# Altium PCB Glucometer-InstrumentationCircuit-SMD.PcbDoc
Units mm, origin at the board's own origin, x right, y up, seen from the top; angles counter-clockwise.
Board outline 83.5 x 91.75 mm, 2 copper layers (Top Layer, Bottom Layer); 34 components, 43 nets, 154 pads, 0 vias.
Unrouted connection lines stored in the file: 101.
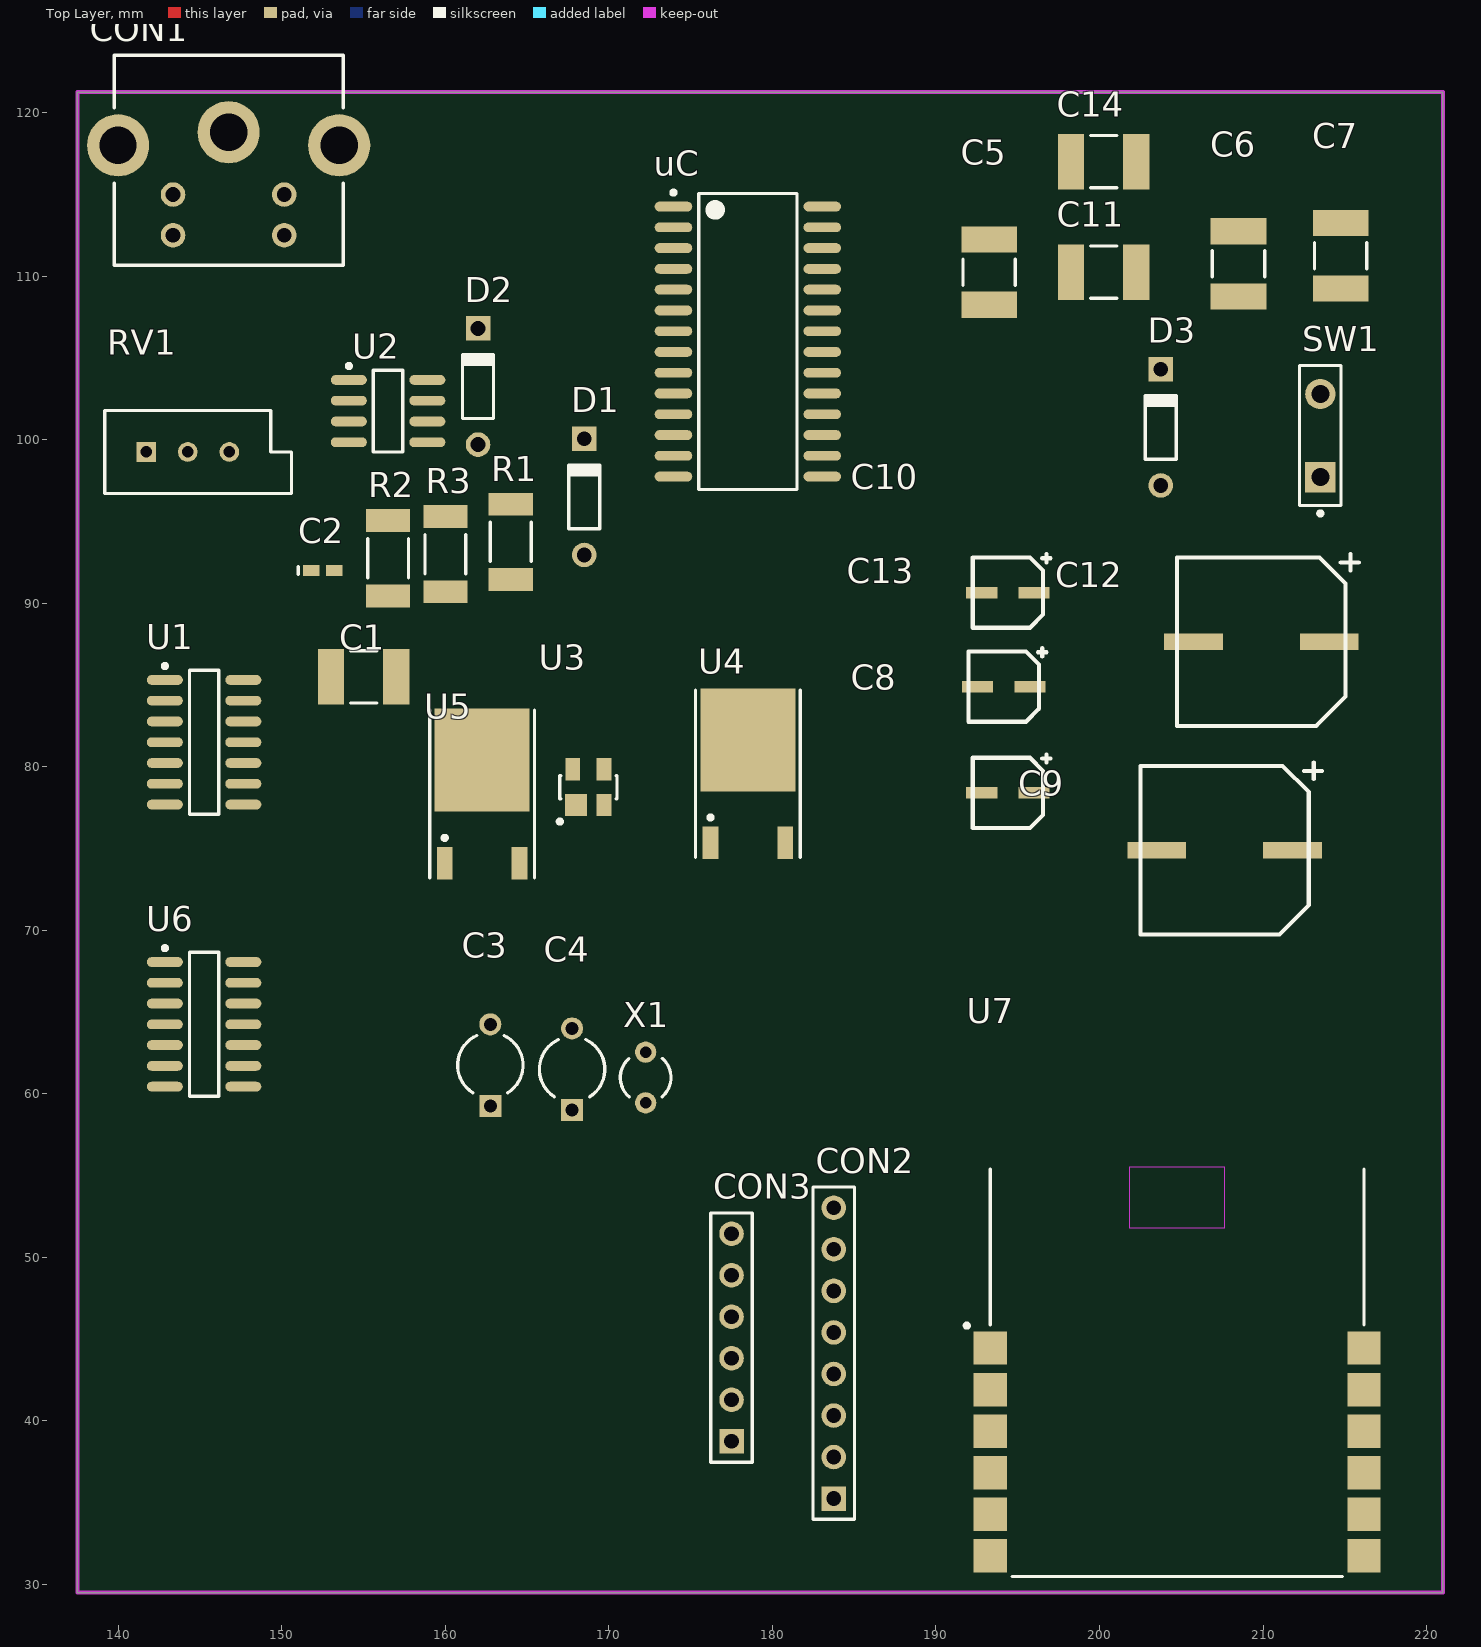
[diagram p0: Top Layer view]
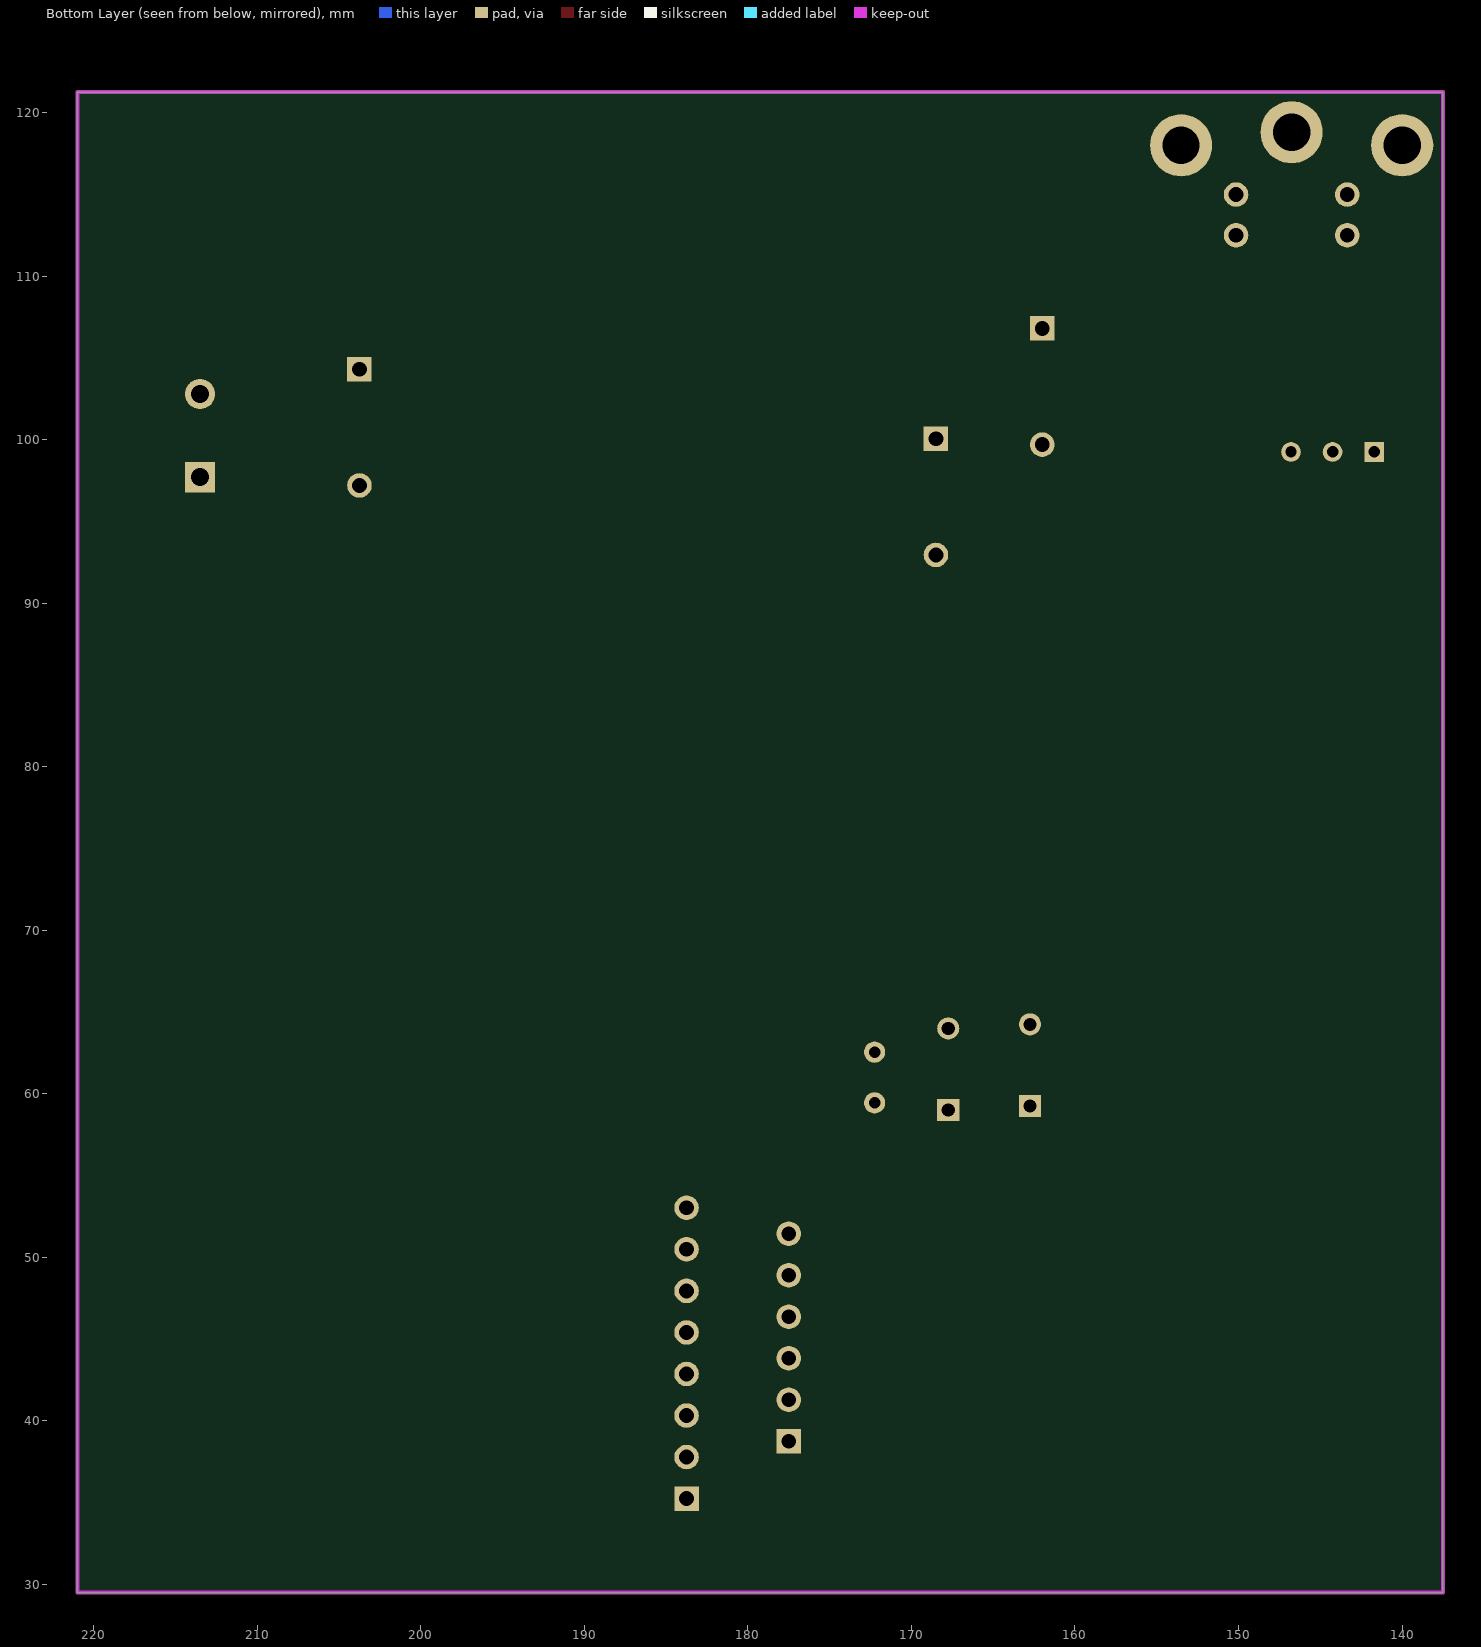
[diagram p1: Bottom Layer view, seen from below]

## Layer stack, top to bottom
Top Layer: signal copper 0.0356
Dielectric: dielectric 0.32, FR-4, Dk 4.8
Bottom Layer: signal copper 0.0356

## Board outline
137.5,29.5 137.5,121.25 221,121.25 221,29.5

## Design rules (kind name [scope] priority, off if disabled: settings)
AssemblyTestPointUsage AssemblyTestPointUsage_1 [All] p2:
AssemblyTestpoint AssemblyTestpoint_1 [All] p2: testpointundercomponent=TRUE minsize=1.016 maxsize=2.54 preferedsize=1.524 minholesize=0 maxholesize=1.016 preferedholesize=0.813 testpointgrid=0.025 usegrid=TRUE gridtolerance=0 allowsidetop=TRUE allowsidebottom=TRUE
Clearance [All] p1: gap=0.25
ComponentClearance ComponentClearance_1 [All] p2: gap=0.254 collisioncheckmode=3 verticalgap=0.254 showdistances=FALSE
DiffPairsRouting DiffPairsRouting_1 [All] p2: maxlimit=0.254 minlimit=0.254 mostfreqgap=0.254 maxuncoupledlength=12.7
FabricationTestPointUsage TestPointUsage [All] p2: valid=0 allowmultiple=FALSE
FabricationTestpoint Testpoint [All] p2: side=3 testpointundercomponent=TRUE minsize=1.016 maxsize=2.54 preferedsize=1.524 minholesize=0 maxholesize=1.016 preferedholesize=0.813 testpointgrid=0.025 allowsidetop=TRUE allowsidebottom=TRUE usegrid=TRUE gridtolerance=0
FanoutControl Fanout_LCC [IsLCC] p1: bgadir=Out bgaviamode=Centered fanoutstyle=Auto fanoutdirection=Alternating viagrid=0.025 // Fanout_LCC (Default Rule)
FanoutControl Fanout_BGA [IsBGA] p2: bgadir=Out bgaviamode=Centered fanoutstyle=Auto fanoutdirection=Alternating viagrid=0.025 // Fanout_BGA (Default Rule)
FanoutControl Fanout_Default [All] p4: bgadir=Out bgaviamode=Centered fanoutstyle=Auto fanoutdirection=Alternating viagrid=0.025 // Fanout_Default (Default Rule)
FanoutControl Fanout_Small [(CompPinCount < 5)] p5: bgadir=Out bgaviamode=Centered fanoutstyle=Auto fanoutdirection=OutThenIn viagrid=0.025 // Fanout_Small (Default Rule)
FanoutControl Fanout_BGA_1 [IsBGA] p6: bgadir=Out bgaviamode=Centered fanoutstyle=Auto fanoutdirection=Alternating viagrid=0.025 // Fanout_BGA (Default Rule)
FanoutControl Fanout_LCC_1 [IsLCC] p7: bgadir=Out bgaviamode=Centered fanoutstyle=Auto fanoutdirection=Alternating viagrid=0.025 // Fanout_LCC (Default Rule)
FanoutControl Fanout_SOIC_1 [IsSOIC] p8: bgadir=Out bgaviamode=Centered fanoutstyle=Auto fanoutdirection=Alternating viagrid=0.025 // Fanout_SOIC (Default Rule)
FanoutControl Fanout_Small_1 [(CompPinCount < 5)] p9: bgadir=Out bgaviamode=Centered fanoutstyle=Auto fanoutdirection=OutThenIn viagrid=0.025 // Fanout_Small (Default Rule)
FanoutControl Fanout_Default_1 [All] p10: bgadir=Out bgaviamode=Centered fanoutstyle=Auto fanoutdirection=Alternating viagrid=0.025 // Fanout_Default (Default Rule)
Height Height_1 [All] p2: minheight=0 maxheight=25.4 prefheight=12.7
HoleSize [All] p1: absolutevalues=TRUE maxlimit=5 minlimit=0.025 maxpercent=80.000 minpercent=20.000
HoleSize HoleSize_1 [All] p2: absolutevalues=TRUE maxlimit=5 minlimit=0.025 maxpercent=80.000 minpercent=20.000
HoleToHoleClearance HoleToHoleClearance_1 [All] p2: gap=0.254 allowstackedmicrovias=TRUE
LayerPairs LayerPairs_1 [All] p2: enforce=TRUE
MinimumSolderMaskSliver MinimumSolderMaskSliver_1 [All] p2: minsoldermaskwidth=0.254
NetAntennae NetAntennae_1 [All] p2: netantennaetolerance=0
PasteMaskExpansion PasteMaskExpansion_1 [All] p2: expansion=0
PlaneClearance PlaneClearance_1 [All] p2: clearance=0.508
PolygonConnect [All] p1: connectstyle=Relief reliefconductorwidth=0.254 reliefentries=4 polygonreliefangle="90 Angle" airgapwidth=0.254
PolygonConnect PolygonConnect_1 [All] p2: connectstyle=Relief reliefconductorwidth=0.254 reliefentries=4 polygonreliefangle="90 Angle" airgapwidth=0.254
RoutingPriority RoutingPriority_1 [All] p2: routingpriority=0
RoutingTopology RoutingTopology_1 [All] p2: topology=Shortest
RoutingVias [All] p1: holewidth=0.8 width=1.5 viastyle="Through Hole" minholewidth=0.7 minwidth=1 maxholewidth=1 maxwidth=2
ShortCircuit ShortCircuit_1 [All] p2: allowed=FALSE
SilkToSilkClearance SilkToSilkClearance_1 [All] p2: silktosilkclearance=0.254
SilkToSolderMaskClearance SilkscreenOverComponentPads [IsPad] p2: minsilkscreentomaskgap=0.254 clearancetoexposedcopper=TRUE
SolderMaskExpansion [All] p1: expansion=0.102
SolderMaskExpansion SolderMaskExpansion_1 [All] p2: expansion=0.102
UnRoutedNet UnRoutedNet_1 [All] p2:
Width [All] p1: maxlimit=5 minlimit=0.25 preferedwidth=0.3 minimp=50.000000 maximp=50.000000 favimp=50.000000
23 further rules are at their usual default settings.

## Classes and differential pairs
component class Glucometer-InstrumentationCircuit-SMD: C1 C2 C3 C4 C5 C6 C7 C8 C9 C10 C11 C12 C13 C14 CON1 CON3 D1 D2 D3 R1 R2 R3 RV1 SW1 U1 U2 U3 U4 U5 U7 uC X1

## Components (designator, comment, footprint, x,y, rotation, side; value= is the part's Value field where it differs from the comment)
C1 "Cap2" CAPC4532N 155,85.5 r0 top
C2 "Cap2" CAPC1005M 152.5,92 r0 top
C3 "Cap" CAPR5-4X5 162.75,61.75 r90 top
C4 "Cap" CAPR5-4X5 167.75,61.5 r90 top
C5 "Cap" CAPC4532N 193.25,110.25 r90 top
C6 "Cap" CAPC4532N 208.5,110.75 r90 top
C7 "Cap" CAPC4532N 214.75,111.25 r90 top
C8 "Cap Pol1" C-4x4 192.25,76.25 r0 top
C9 "Cap Pol1" C-10x10 202.5,69.75 r0 top
C10 "Cap Pol1" C-4x4 192.25,88.5 r0 top
C11 "Cap" CAPC4532N 200.25,110.25 r0 top
C12 "Cap Pol1" C-10x10 204.75,82.5 r0 top
C13 "Cap Pol1" C-4x4 192,82.75 r0 top
C14 "Cap" CAPC4532N 200.25,117 r0 top
CON1 "" CDIN2.6-3H4A 146.75,123.5 r270 top
CON2 "Header 8" HDR1X8 183.75,35.25 r90 top
CON3 "Header 6" HDR1X6 177.5,38.75 r90 top
D1 "1N4148" DO-35 168.5,96.5 r90 top
D2 "1N4148" DO-35 162,103.25 r90 top
D3 "1N4148" DO-35 203.75,100.75 r90 top
R1 "Res1" RESC5025N 164,93.75 r90 top
R2 "Res1" RESC5025N 156.5,92.75 r90 top
R3 "Res1" RESC5025N 160,93 r90 top
RV1 "RPot" VR5 144.25,99.25 r0 top
SW1 "SW-PB" SPST-2 213.5,100.25 r90 top
U1 "LMC6044IN" M14A_N 145.25,81.5 r0 top
U2 "LM385BM" M08A_N 156.5,101.75 r0 top
U3 "SMT811TW16F" SOT143 168.75,78.75 r0 top
U4 "µA78M33CKVURG3" KTP02 178.5,78.5 r0 top
U5 "µA78M05CKTPR" KTP02 162.25,77.25 r0 top
U6 "AD5241" R-14_N 145.25,64.25 r0 top
U7 "MRF24J40MB-I/RM" MRF24J40MB 204.75,55.5 r0 top
uC "PIC24FJ64GA102-I/SO" SOIC-SO28_N 178.5,106 r0 top
X1 "XTAL" R38 172.25,61 r0 top

## Footprints (in the part's own frame and the unit in brackets; to place one, negate y for a bottom-side part, rotate by r counter-clockwise, add the part's x,y. Pads: shape width x height; smd on the part's side, far side on the other; paste and mask are expansions set on the pad)
C-4x4 [mm] "SMD Polar Aluminium Capacitor, 4x4mm, 10V"
  rect 1.9x0.7 smd: 1(3.75,2.15) 2(0.55,2.15)
  silkscreen extent 0,0 4.75,4.5, body extent 0,0 4.3,4.3, height 5.4
C-10x10 [mm] "SMD Polar Aluminium Capacitor, 10x10mm, 10V"
  rect 3.6x1 smd: 1(9.3,5.15) 2(1,5.15)
  silkscreen extent 0,0 11.1,10.5, body extent 0,0 10.3,10.3, height 10.3
CAPC1005M [mm] "Chip Capacitor, Body 1.0x0.5mm, IPC Low Density"
  rect 1x0.7 smd: 1(-0.7,0) 2(0.7,0)
  silkscreen extent -1.5,-0.25 -1.5,0.25, body extent -0.55,-0.3 0.55,0.3, height 0.6
CAPC4532N [mm] "Chip Capacitor, Body 4.5x3.2mm, IPC Medium Density"
  rect 1.6x3.4 smd: 1(-2,0) 2(2,0)
  silkscreen extent -0.8,-1.6 0.8,1.6, body extent -2.4,-1.7 2.4,1.7, height 1.35
CAPR5-4X5 [mm] "Capacitor; 2 Leads"
  rect 1.35x1.35 hole 0.8: 1(-2.5,0)
  round 1.35 hole 0.8: 2(2.5,0)
  silkscreen extent -1.69,-2 1.82,2
CDIN2.6-3H4A [mm] "Connector; Circular DIN, Thru-Hole; 4 Position; Right Angle; Pitch 2.1/2.6 mm; Body 14 x 12.84 x 13 mm (WxTxH), Shielded, Special PCB Retention"
  round 1.5 hole 0.9: 1(8.51,-3.4) 2(8.51,3.4) 3(11,-3.4) 4(11,3.4)
  round 3.8 hole 2.28: MH1(5.5,-6.76) MH2(4.7,0) MH3(5.5,6.76)
  silkscreen extent 0,-7 12.84,7, body extent 0,-7 12.84,7, height 13
DO-35 [mm] "Diode, Axial; Body 3.8 x 1.9 mm (LxDia. max), Lead Dia. 0.53 mm (max)"
  round 1.5 hole 0.9: 1(-3.55,0)
  rect 1.5x1.5 hole 0.9: 2(3.55,0)
  silkscreen extent -1.95,-0.95 2.05,0.95
HDR1X6 [mm] "Connector; Header; 6 Position"
  rect 1.5x1.5 hole 0.9: 1(0,0)
  round 1.5 hole 0.9: 2(2.54,0) 3(5.08,0) 4(7.62,0) 5(10.16,0) 6(12.7,0)
  silkscreen extent -1.27,-1.27 13.97,1.27
HDR1X8 [mm] "Connector; Header; 8 Position"
  rect 1.5x1.5 hole 0.9: 1(0,0)
  round 1.5 hole 0.9: 2(2.54,0) 3(5.08,0) 4(7.62,0) 5(10.16,0) 6(12.7,0) 7(15.24,0) 8(17.78,0)
  silkscreen extent -1.27,-1.27 19.05,1.27
KTP02 [mm] "PowerFLEX (D-PAK/TO-252-AA); 3 Leads (1 Cropped); Body 9.7 (inc. leads) x 6.2 mm (LxW max)"
  rect 0.95x2 smd: 1(-2.285,-3.15) 3(2.285,-3.15)
  rect 5.8x6.3 smd: 4(0,3.15)
  silkscreen extent -3.2,-4.05 3.2,6.2
M08A_N [mm] "SOIC, 8-Leads, Body 4.9x3.9mm, Pitch 1.27mm, IPC Medium Density"
  oval 2.2x0.6 smd: 1(-2.4,1.905) 2(-2.4,0.635) 3(-2.4,-0.635) 4(-2.4,-1.905) 5(2.4,-1.905) 6(2.4,-0.635) 7(2.4,0.635) 8(2.4,1.905)
  silkscreen extent -2.52,-2.5 0.9,2.88, body extent -2,-2.5 2,2.5, height 1.75
M14A_N [mm] "SOIC, 14-Leads, Body 8.6x3.9mm, Pitch 1.27mm, IPC Medium Density"
  oval 2.2x0.6 smd: 1(-2.4,3.81) 2(-2.4,2.54) 3(-2.4,1.27) 4(-2.4,0) 5(-2.4,-1.27) 6(-2.4,-2.54) 7(-2.4,-3.81) 8(2.4,-3.81) 9(2.4,-2.54) 10(2.4,-1.27) 11(2.4,0) 12(2.4,1.27) 13(2.4,2.54) 14(2.4,3.81)
  silkscreen extent -2.52,-4.4 0.9,4.78, body extent -2,-4.38 2,4.38, height 1.75
MRF24J40MB [mil] "SM Module; 12 Leads; Body 33x22.9x2.5mm (LxWxH), Microchip Recommended"
  rect 80x80 smd paste-159.45 mask+2: 1(-450,-435) 2(-450,-535) 3(-450,-635) 4(-450,-735) 5(-450,-835) 6(-450,-935) 7(450,-935) 8(450,-835) 9(450,-735) 10(450,-635) 11(450,-535) 12(450,-435)
  Top Layer keep-out region: -115,-145 115,-145 115,0 -115,0
  silkscreen extent -511,-985 450,-4, body extent -450,-985 450,315, height 100
R38 [mm] "Crystal, Thru-Hole; 2 Leads; Body 3.1 x 8.2 mm (Dia.xH)"
  round 1.3 hole 0.7: 1(0,1.55) 2(0,-1.55)
  silkscreen extent -1.55,-1.19 1.55,1.17
R-14_N [mm] "14-Pin Narrow Body Small Outline Integrated Circuit 1.27 mm Pitch, IPC Medium Density"
  oval 2.2x0.6 smd: 1(-2.4,3.81) 2(-2.4,2.54) 3(-2.4,1.27) 4(-2.4,0) 5(-2.4,-1.27) 6(-2.4,-2.54) 7(-2.4,-3.81) 8(2.4,-3.81) 9(2.4,-2.54) 10(2.4,-1.27) 11(2.4,0) 12(2.4,1.27) 13(2.4,2.54) 14(2.4,3.81)
  silkscreen extent -2.52,-4.4 0.9,4.78, body extent -1.95,-4.33 1.95,4.33, height 1.75
RESC5025N [mm] "Chip Resistor, Body 5.0x2.5mm, IPC Medium Density"
  rect 1.4x2.7 smd: 1(-2.3,0) 2(2.3,0)
  silkscreen extent -1.2,-1.25 1.2,1.25, body extent -2.58,-1.33 2.58,1.33, height 0.71
SOIC-SO28_N [mm] "SOIC, 28-Leads, Body 17.9x7.5mm, Pitch 1.27mm, IPC Medium Density"
  oval 2.3x0.6 smd: 1(-4.55,8.255) 2(-4.55,6.985) 3(-4.55,5.715) 4(-4.55,4.445) 5(-4.55,3.175) 6(-4.55,1.905) 7(-4.55,0.635) 8(-4.55,-0.635) 9(-4.55,-1.905) 10(-4.55,-3.175) 11(-4.55,-4.445) 12(-4.55,-5.715) 13(-4.55,-6.985) 14(-4.55,-8.255) 15(4.55,-8.255) 16(4.55,-6.985) 17(4.55,-5.715) 18(4.55,-4.445) 19(4.55,-3.175) 20(4.55,-1.905) 21(4.55,-0.635) 22(4.55,0.635) 23(4.55,1.905) 24(4.55,3.175) 25(4.55,4.445) 26(4.55,5.715) 27(4.55,6.985) 28(4.55,8.255)
  silkscreen extent -4.67,-9.05 3,9.23, body extent -3.8,-9.06 3.8,9.06, height 2.65
SOT143 [mm] "SOT-143; 4 Leads; Body 3 x 2.6 mm, inc. leads (LxW max)"
  rect 1.35x1.35 smd: 1(-0.75,-1.1)
  rect 0.9x1.35 smd: 2(0.95,-1.1) 3(0.95,1.1) 4(-0.95,1.1)
  silkscreen extent -1.87,-2.22 1.75,0.7
SPST-2 [mm] "Switch; 2 Leads"
  rect 1.85x1.85 hole 1.1: 1(-2.54,0)
  round 1.85 hole 1.1: 2(2.54,0)
  silkscreen extent -4.89,-1.27 4.28,1.27
VR5 [mm] "Thru-Hole; 3 Leads"
  rect 1.2x1.2 hole 0.7: 1(-2.54,0)
  round 1.2 hole 0.7: 2(0,0) 3(2.54,0)
  silkscreen extent -5.08,-2.54 6.35,2.54

## Part data
C1 C2 C3 C4 C5 C6 C7 C11 C14: "Capacitor"
C8 C9 C10 C12 C13: "Polarized Capacitor (Radial)"
CON1: library part "MiniDin 4Pins - SuperVideo", "MiniDin 4 Pins"
CON2: "Header, 8-Pin"
CON3: "Header, 6-Pin"
D1 D2 D3: "High Conductance Fast Diode"
R1 R2 R3: "Resistor"
RV1: "Potentiometer"
SW1: "Switch"
U1: "CMOS Quad Micropower Operational Amplifier, 14-pin MDIP"
U2: "Adjustable Micropower Voltage Reference, 8-pin Narrow SOIC"
U3: "Reset Circuit, 3.08V, Push Pull Inverted RST"
U4 U5: "Positive-Voltage Regulator"
U6: "AD5241BR"
U7: "2.4 GHz IEEE Std. 802.15.4, 20 dBm RF Transceiver 12-Pin Module, Industrial Temperature"
uC: "General purpose 16-bit Flash Microcontroller with nanoWatt XLP, 64KB Flash, 8KB SRAM, 28-Pin SOIC, Industrial Temperature"
X1: "Crystal Oscillator"

## Nets (pads, with @x,y where several pads share a name; then routed paths per layer and width w, separated by ;. In a path a pad name is that pad's centre, name@x,y a point inside that pad or via, vN(x,y) a via of type N, cw(c..) or ccw(c..) an arc to the next point about the centre after c; other vN are vias at no path point)
3.3V: C5.2 C6.2 C7.2 C10.1 C11.2 CON3.2 U3.4 U4.3 U6.1 U6.4 U6.5 U7.10
5V: C1.1 C13.1 C14.2 CON2.4 R1.2 U1.4 U5.3
GND: C1.2 C3.1 C4.1 C5.1 C6.1 C7.1 C8.2 C9.2 C10.2 C11.1 C12.2 C13.2 C14.1 CON1.MH1 CON1.MH2 CON1.MH3 CON2.5 CON3.3 SW1.1 U3.1 U4.4 U5.4 U6.3 U6.8 U6.9 U6.10 U6.11 U7.1 U7.11 U7.12 uC.8 uC.19 uC.27
NetC2_1: C2.1 CON1.2 CON2.7 D1.2 D2.1 R2.2 R3.2 U1.9
NetC2_2: C2.2 CON2.6 R2.1 R3.1 U1.8
NetC3_2: C3.2 uC.9 X1.1
NetC4_2: C4.2 uC.10 X1.2
NetC8_1: C8.1 uC.20
NetCON1_1: CON1.1 CON2.1 U1.3
NetCON1_3: CON1.3 CON2.2 U1.7
NetCON2_3: CON2.3 U1.5 U6.2
NetCON3_1: CON3.1 D3.2 uC.1
NetCON3_4: CON3.4 uC.21
NetCON3_5: CON3.5 uC.22
NetD3_1: D3.1 U3.2
NetR1_1: R1.1 RV1.3 U1.12 U2.4
NetRV1_3: RV1.2 U2.5
NetSW1_2: SW1.2 U3.3
NetU1_1: U1.1 U1.2 U1.6
NetU6_6: U6.6 uC.17
NetU6_7: U6.7 uC.18
NetU7_2: U7.2
NetU7_3: U7.3
NetU7_4: U7.4
NetU7_5: U7.5 uC.14
NetU7_6: U7.6 uC.16
NetU7_7: U7.7 uC.15
NetU7_8: U7.8 uC.11
NetuC_2: uC.2
NetuC_3: uC.3
NetuC_4: uC.4
NetuC_5: uC.5
NetuC_6: uC.6
NetuC_7: uC.7
NetuC_12: uC.12
NetuC_23: uC.23
NetuC_24: uC.24
NetuC_25: uC.25
NetuC_26: uC.26
VCC: uC.13 uC.28
VDD: C9.1 C12.1 U4.1 U5.1
VGND: CON1.4 CON2.8 D1.1 D2.2 U1.10 U1.13 U1.14
VV-: RV1.1 U1.11 U2.8
pads on no net: CON3.6 U2.1 U2.2 U2.3 U2.6 U2.7 U6.12 U6.13 U6.14 U7.9

## Keep-outs
Keep-Out Layer:
  the board outline again, w0.254

## Silkscreen, mask and mechanical layers (free items; w line width, h text height)
Mechanical 16:
  lines w0.127: 0,53.975 5.08,53.975 ; 0,107.95 5.08,107.95 ; 0,161.925 5.08,161.925 ; 69.85,0 69.85,5.08 ; 69.85,210.82 69.85,215.9 ; 139.7,0 139.7,5.08 ; 139.7,210.82 139.7,215.9 ; 209.55,0 209.55,5.08 ; 209.55,210.82 209.55,215.9 ; 274.32,53.975 279.4,53.975 ; 274.32,107.95 279.4,107.95 ; 274.32,161.925 279.4,161.925 ; 0,0 0,215.9 279.4,215.9 279.4,0 0,0 ; 5.08,5.08 274.32,5.08 274.32,210.82 5.08,210.82 5.08,5.08
  text "1" at 34.324,212.471 h1.78
  text "2" at 104.191,212.471 h1.78
  text "3" at 173.914,212.471 h1.78
  text "4" at 243.789,212.471 h1.78
  text "A" at 1.905,186.614 h1.78
  text "A" at 276.225,186.614 h1.78
  text "B" at 1.905,132.639 h1.78
  text "B" at 276.225,132.639 h1.78
  text "C" at 1.905,78.664 h1.78
  text "C" at 276.225,78.664 h1.78
  text "D" at 1.905,24.816 h1.78
  text "D" at 276.225,24.816 h1.78
  text "1" at 34.324,1.651 h1.78
  text "2" at 104.191,1.651 h1.78
  text "3" at 173.914,1.651 h1.78
  text "4" at 243.789,1.651 h1.78

## Dimensions
137.5,121.25 to 137.5,29.5 on Keep-Out Layer
137.5,121.25 to 221,121.25 on Keep-Out Layer

## Text inside footprints (layer, text, board x,y; h text height)
CON1: Mechanical 1 "PCB Edge" at 140.05,122.9 h0.25